# EAGLE board main (EAGLE 7.6.0)
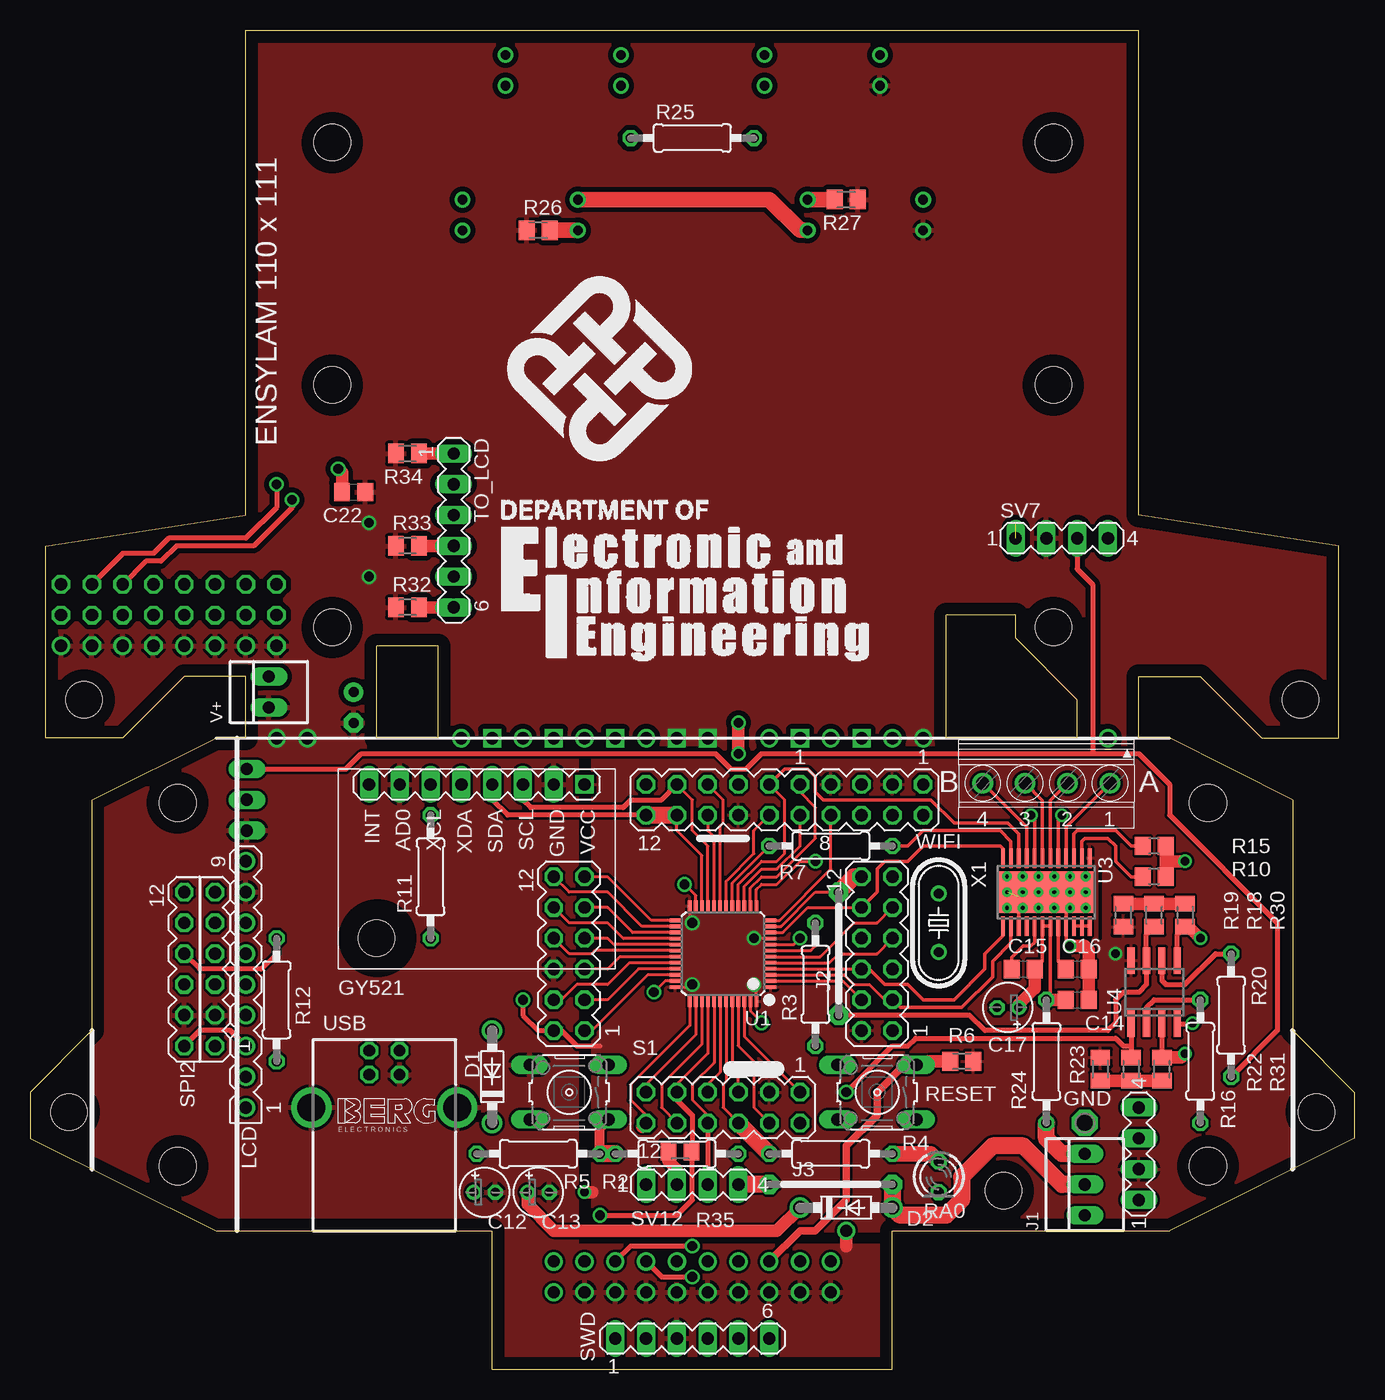
[diagram p0: board, top side]
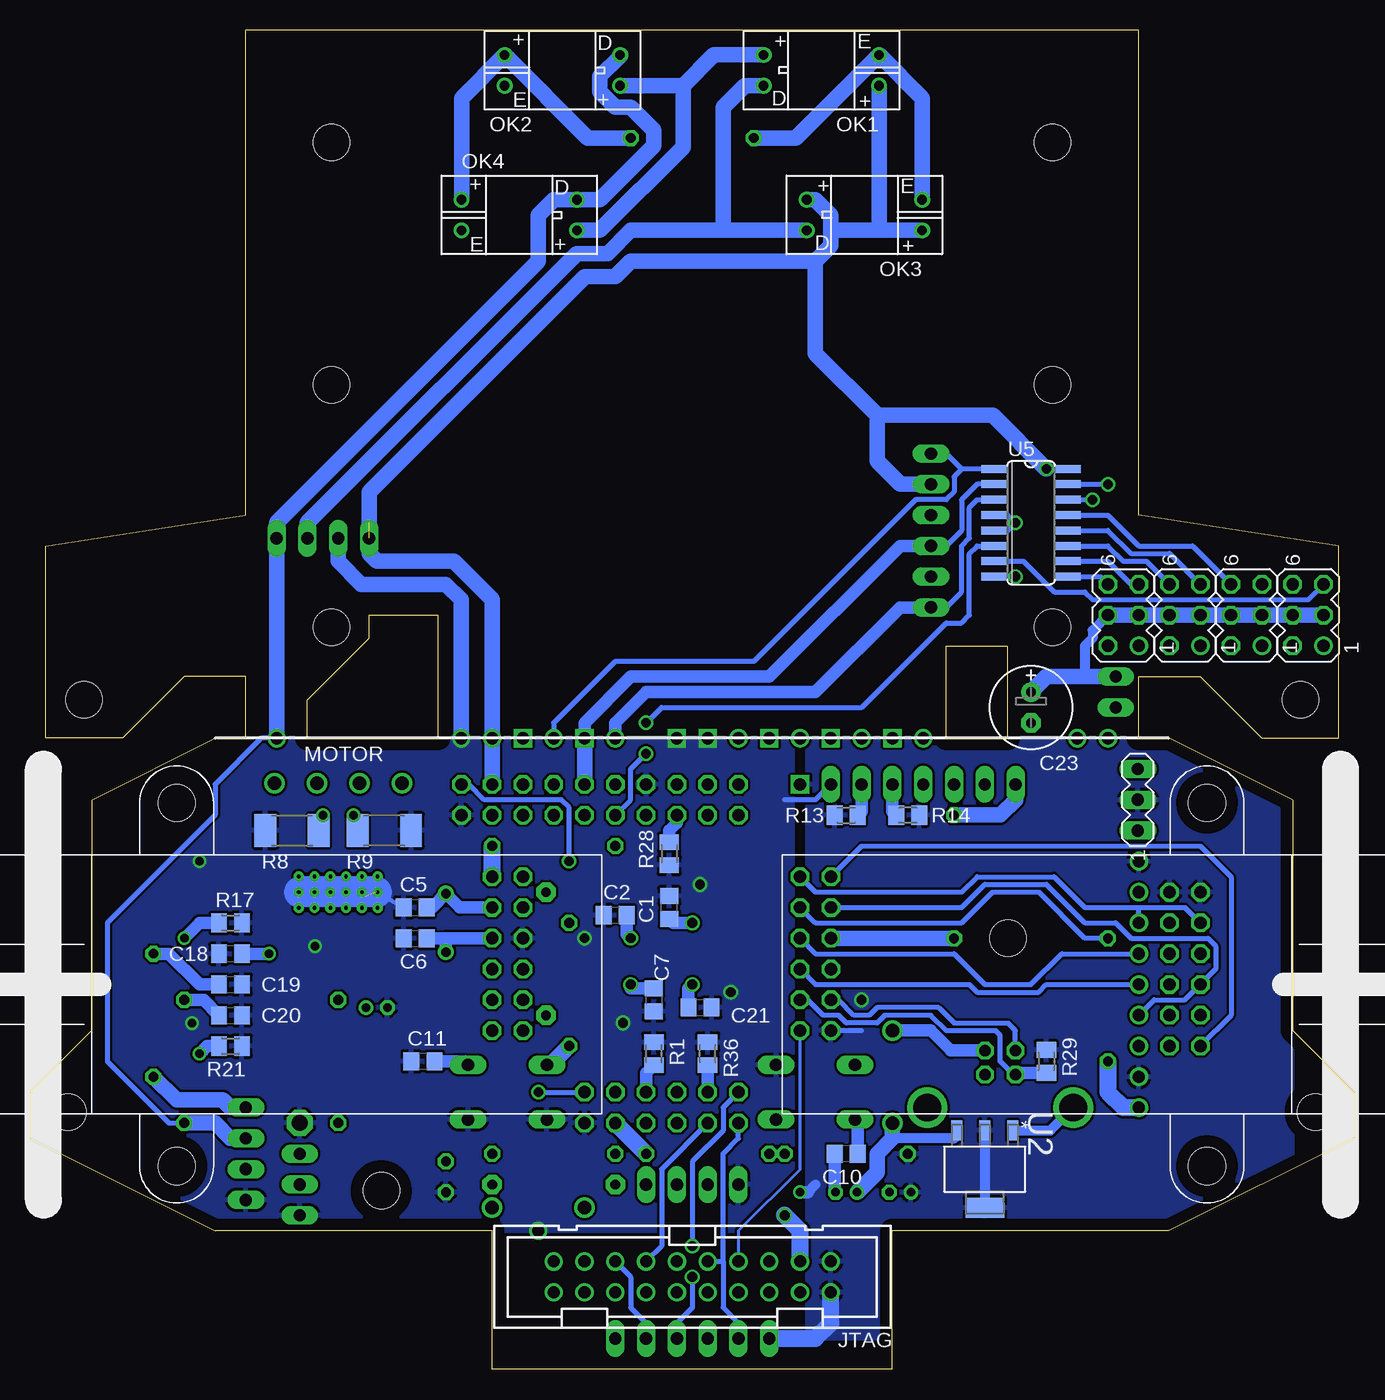
[diagram p1: board, bottom side, seen from below]

Size 109.22 x 110.49 mm. Coordinates in mm from the lower left corner, seen from the top.
Outline: 15.32,11.43 38.1,11.43 38.1,0 71.12,0 71.12,11.43 93.98,11.43 109.22,19.05 109.22,22.86 104.14,27.94 104.14,46.99 93.98,52.07 91.44,52.07 91.44,57.15 96.52,57.15 101.6,52.07 107.95,52.07 107.95,67.94 91.44,70.48 91.44,110.49 17.78,110.49 17.78,70.48 1.27,67.94 1.27,52.07 7.62,52.07 12.7,57.15 17.78,57.15 17.78,52.07 15.32,52.07 5.08,46.99 5.08,27.94 0,22.86 0,19.05 15.32,11.43
Outline: 86.36,52.07 75.56,52.07 75.56,62.23 81.28,62.23 81.28,60.33 86.36,55.24 86.36,52.07
Outline: 28.57,52.07 28.57,59.69 33.66,59.69 33.66,52.07 28.57,52.07
Copper layers (1*16): Top 0.035mm / dielectric 1.5mm / Bottom 0.035mm
Design rules "default": minimum track width 10mil, minimum drill 24mil, track to track 8mil, track to pad 8mil, pad to pad 8mil, via to via 8mil, smd to smd 8mil, copper to edge 40mil, drill to drill 8mil, minimum pad ring 10mil, minimum via ring 8mil, stop-mask expansion 4mil, vias tented up to drill 0mil, thermal gap 10mil
Holes 3 mm at 28.57,35.56 80.26,14.73 24.91,101.22 84.39,101.22 24.91,81.22 84.39,81.22 24.91,61.22 84.39,61.22 106.09,21.22 3.21,21.22 4.45,55.24 104.78,55.24
tRestrict: area 73.7,38.1 to 76.2,40.6; area 73.7,33 to 76.2,35.6; area 25.6,32.6 to 31.6,38.6; 2 lines
bRestrict: area 25.6,32.6 to 31.6,38.6

## Footprints (pad centres in the part's own frame; a part is rotated, then mirrored left to right if it is on the bottom)
C0805 = smd 1.3 x 1.5: 1 -0.95,0; 2 0.95,0
E1,8-4 = drill 0.711 pad 1.168: + -0.889,0 | drill 0.711 pad 1.168 octagon: - 0.889,0
E2,5-7 = drill 0.813 pad 1.6: + -1.27,0 | drill 0.813 pad 1.6 octagon: - 1.27,0
DO41-7.6 = drill 1.1 pad 1.7: A 3.81,0; C -3.81,0
P1-13 = drill 1.321 pad 2.159 octagon: TP 0,0
GY-521 = drill 1.016 square: 1 -8.89,0 | drill 1.016 long: 2 -6.35,0; 3 -3.81,0; 4 -1.27,0; 5 1.27,0; 6 3.81,0; 7 6.35,0; 8 8.89,0
22-23-2031 = drill 1 long: 1 -2.54,0; 2 0,0; 3 2.54,0
10 = drill 0.813 pad 1.6 octagon: 1 -5.08,0; 2 5.08,0
PAK100/2500-20 = drill 1 pad 1.422: 1 -11.43,-1.27; 2 -11.43,1.27; 3 -8.89,-1.27; 4 -8.89,1.27; 5 -6.35,-1.27; 6 -6.35,1.27; 7 -3.81,-1.27; 8 -3.81,1.27; 9 -1.27,-1.27; 10 -1.27,1.27; 11 1.27,-1.27; 12 1.27,1.27; 13 3.81,-1.27; 14 3.81,1.27; 15 6.35,-1.27; 16 6.35,1.27; 17 8.89,-1.27; 18 8.89,1.27; 19 11.43,-1.27; 20 11.43,1.27
MA09-1 = drill 1.016: 1 -10.16,0; 2 -7.62,0; 3 -5.08,0; 4 -2.54,0; 5 0,0; 6 2.54,0; 7 5.08,0; 8 7.62,0; 9 10.16,0
1751264 = drill 1.1 pad 1.7: 1 -5.25,-0.1; 2 -1.75,-0.1; 3 1.75,-0.1; 4 5.25,-0.1
KTIR0511S = drill 0.8: 1 -5.715,1.27; 2 -5.715,-1.27; 3 3.81,-1.27; 4 3.81,1.27
M0805 = smd 1.3 x 1.6: 1 -0.95,0; 2 0.95,0
0207/10 = drill 0.813 octagon: 1 -5.08,0; 2 5.08,0
R2010 = smd 1.8 x 2.7: 1 -2.2,0; 2 2.2,0
R0805 = smd 1.3 x 1.5: 1 -0.95,0; 2 0.95,0
LED3MM = drill 0.813 octagon: A -1.27,0; K 1.27,0
B3F-10XX = drill 1.016 long: 1 -3.251,2.261; 2 3.251,2.261; 3 -3.251,-2.261; 4 3.251,-2.261
MA06-2 = drill 1.016 octagon: 1 -6.35,-1.27; 2 -6.35,1.27; 3 -3.81,-1.27; 4 -3.81,1.27; 5 -1.27,-1.27; 6 -1.27,1.27; 7 1.27,-1.27; 8 1.27,1.27; 9 3.81,-1.27; 10 3.81,1.27; 11 6.35,-1.27; 12 6.35,1.27
MA03-1 = drill 1.016 long: 1 -2.54,0; 2 0,0; 3 2.54,0
MA04-1 = drill 1.016 long: 1 -3.81,0; 2 -1.27,0; 3 1.27,0; 4 3.81,0
MA03-2 = drill 1.016: 1 -2.54,-1.27 | drill 1.016 octagon: 2 -2.54,1.27; 3 0,-1.27; 4 0,1.27; 5 2.54,-1.27; 6 2.54,1.27
MA06-1 = drill 1.016 long: 1 -6.35,0; 2 -3.81,0; 3 -1.27,0; 4 1.27,0; 5 3.81,0; 6 6.35,0
LQFP48-7X7 = smd 0.9 x 0.3: 1 -3.95,2.75; 2 -3.95,2.25; 3 -3.95,1.75; 4 -3.95,1.25; 5 -3.95,0.75; 6 -3.95,0.25; 7 -3.95,-0.25; 8 -3.95,-0.75; 9 -3.95,-1.25; 10 -3.95,-1.75; 11 -3.95,-2.25; 12 -3.95,-2.75; 25 3.95,-2.75; 26 3.95,-2.25; 27 3.95,-1.75; 28 3.95,-1.25; 29 3.95,-0.75; 30 3.95,-0.25; 31 3.95,0.25; 32 3.95,0.75; 33 3.95,1.25; 34 3.95,1.75; 35 3.95,2.25; 36 3.95,2.75 | smd 0.3 x 0.9: 13 -2.75,-3.95; 14 -2.25,-3.95; 15 -1.75,-3.95; 16 -1.25,-3.95; 17 -0.75,-3.95; 18 -0.25,-3.95; 19 0.25,-3.95; 20 0.75,-3.95; 21 1.25,-3.95; 22 1.75,-3.95; 23 2.25,-3.95; 24 2.75,-3.95; 37 2.75,3.95; 38 2.25,3.95; 39 1.75,3.95; 40 1.25,3.95; 41 0.75,3.95; 42 0.25,3.95; 43 -0.25,3.95; 44 -0.75,3.95; 45 -1.25,3.95; 46 -1.75,3.95; 47 -2.25,3.95; 48 -2.75,3.95
SOT230P700X180-4N = smd 1.626 x 0.889: 1 -3.2,2.311; 2 -3.2,0; 3 -3.2,-2.311 | smd 1.626 x 3.175: 4 3.2,0
PWP-TSSOP24 = smd 1.6 x 0.3: 1 -2.8,3.575; 2 -2.8,2.925; 3 -2.8,2.275; 4 -2.8,1.625; 5 -2.8,0.975; 6 -2.8,0.325; 7 -2.8,-0.325; 8 -2.8,-0.975; 9 -2.8,-1.625; 10 -2.8,-2.275; 11 -2.8,-2.925; 12 -2.8,-3.575; 13 2.8,-3.575; 14 2.8,-2.925; 15 2.8,-2.275; 16 2.8,-1.625; 17 2.8,-0.975; 18 2.8,-0.325; 19 2.8,0.325; 20 2.8,0.975; 21 2.8,1.625; 22 2.8,2.275; 23 2.8,2.925; 24 2.8,3.575 | smd 3.4 x 7.8: EXP 0,0 | drill 0.3 pad 0.7: EXP@1 -1.3,3.25; EXP@2 0,3.25; EXP@3 1.3,3.25; EXP@4 -1.3,1.95; EXP@5 0,1.95; EXP@6 1.3,1.95; EXP@7 -1.3,0.65; EXP@8 0,0.65; EXP@9 1.3,0.65; EXP@10 -1.3,-0.65; EXP@11 0,-0.65; EXP@12 1.3,-0.65; EXP@13 -1.3,-1.95; EXP@14 0,-1.95; EXP@15 1.3,-1.95; EXP@16 -1.3,-3.25; EXP@17 0,-3.25; EXP@18 1.3,-3.25
SO08 = smd 0.6 x 2.2: 1 -1.905,-2.6; 2 -0.635,-2.6; 3 0.635,-2.6; 4 1.905,-2.6; 5 1.905,2.6; 6 0.635,2.6; 7 -0.635,2.6; 8 -1.905,2.6
SO16 = smd 0.66 x 2.032: 1 -4.445,-3.073; 2 -3.175,-3.073; 3 -1.905,-3.073; 4 -0.635,-3.073; 5 0.635,-3.073; 6 1.905,-3.073; 7 3.175,-3.073; 8 4.445,-3.073; 9 4.445,3.073; 10 3.175,3.073; 11 1.905,3.073; 12 0.635,3.073; 13 -0.635,3.073; 14 -1.905,3.073; 15 -3.175,3.073; 16 -4.445,3.073
70103 = hole 3.048: -14.986,0; 14.986,0
PN61729-S = drill 0.95 octagon: 1 1.25,4.71; 2 -1.25,4.71; 3 -1.25,2.71; 4 1.25,2.71 | drill 2.3 pad 2.9: S1 -6.02,0; S2 6.02,0
22-23-2021 = drill 1 long: 1 -1.27,0; 2 1.27,0
MA04-2 = drill 1.016 octagon: 1 -3.81,-1.27; 2 -3.81,1.27; 3 -1.27,-1.27; 4 -1.27,1.27; 5 1.27,-1.27; 6 1.27,1.27; 7 3.81,-1.27; 8 3.81,1.27
HC49/S = drill 0.813: 1 -2.413,0; 2 2.413,0

## Placement (x,y rotation side)
C1  0u1  [C0805]  56.52,38.1 90 bottom
C2  0u1  [C0805]  60.96,37.47 180 bottom
C5  12p  [C0805]  77.47,38.1 0 bottom
C6  12p  [C0805]  77.47,35.56 0 bottom
C7  0u1  [C0805]  57.78,30.48 270 bottom
C10  0u1  [C0805]  41.91,17.78 180 bottom
C11  0u1  [C0805]  76.83,25.4 180 bottom
C12  47u  [E1,8-4]  37.47,14.61 0 top
C13  47u  [E1,8-4]  41.91,14.61 0 top
C14  10n  [C0805]  86.36,30.48 0 top
C15  10n  [C0805]  81.92,33.02 0 top
C16  2u2  [C0805]  86.36,33.02 0 top
C17  47u  [E1,8-4]  80.64,29.84 180 top
C18  0u1  [C0805]  92.71,34.29 180 bottom
C19  1n  [C0805]  92.71,31.75 0 bottom
C20  1n  [C0805]  92.71,29.21 0 bottom
C21  0u1  [C0805]  53.98,29.84 0 bottom
C22  0u1  [C0805]  26.67,72.39 0 top
C23  [E2,5-7]  26.67,54.61 270 bottom
D1  1N5819-B  [DO41-7.6]  38.1,24.13 90 top
D2  1N5819-B  [DO41-7.6]  67.31,13.33 0 top
GND  PTR1PAD1-13  [P1-13]  87,20.32 0 top
GY521  GY-521  [GY-521]  36.83,48.26 180 top
J1  22-23-2031  [22-23-2031]  87,15.24 90 top
J2  J10MM  [10]  66.67,34.29 90 top
J3  J10MM  [10]  66.04,15.24 0 top
JTAG  2520-  [PAK100/2500-20]  54.61,7.62 180 bottom
LCD  [MA09-1]  17.78,31.75 90 top
MOTOR  1751264  [1751264]  83.82,48.26 180 top
OK1  PHOTOINTERRUPTERKTIR0511S  [KTIR0511S]  44.92,107.19 180 bottom
OK2  PHOTOINTERRUPTERKTIR0511S  [KTIR0511S]  64.38,107.19 0 bottom
OK3  PHOTOINTERRUPTERKTIR0511S  [KTIR0511S]  41.36,95.25 180 bottom
OK4  PHOTOINTERRUPTERKTIR0511S  [KTIR0511S]  67.93,95.25 0 bottom
R1  10K  [M0805]  57.78,26.04 270 bottom
R2  470R  [0207/10]  53.34,17.78 180 top
R3  0R  [0207/10]  64.77,31.75 90 top
R4  470R  [0207/10]  66.04,17.78 0 top
R5  10K  [0207/10]  41.91,17.78 180 top
R6  10K  [M0805]  76.83,25.4 0 top
R7  0R  [0207/10]  66.04,43.18 180 top
R8  0R4  [R2010]  87.63,44.45 0 bottom
R9  0R4  [R2010]  80.01,44.45 180 bottom
R10  10K  [R0805]  92.71,40.64 180 top
R11  [0207/10]  33.02,40.64 90 top
R12  [0207/10]  20.32,30.48 270 top
R13  2K2  [M0805]  41.91,45.72 180 bottom
R14  2K2  [M0805]  36.83,45.72 0 bottom
R15  10K  [R0805]  92.71,43.18 180 top
R16  1K  [0207/10]  96.52,25.4 90 top
R17  2K2  [M0805]  92.71,36.83 180 bottom
R18  3K3  [M0805]  92.71,37.47 270 top
R19  1K  [M0805]  90.17,37.47 270 top
R20  1K  [0207/10]  99.06,29.21 90 top
R21  2K2  [M0805]  92.71,26.67 180 bottom
R22  3K3  [M0805]  90.81,24.77 90 top
R23  1K  [M0805]  88.27,24.77 90 top
R24  0R  [0207/10]  83.82,25.4 270 top
R25  150R  [0207/10]  54.61,101.6 0 top
R26  4K7  [M0805]  41.91,93.98 0 top
R27  4K7  [M0805]  67.31,96.52 180 top
R28  10K  [M0805]  56.52,42.55 90 bottom
R29  1K5  [M0805]  25.4,25.4 90 bottom
R30  1K  [M0805]  95.25,37.47 90 top
R31  1K  [M0805]  93.34,24.77 270 top
R32  10K  [M0805]  31.11,62.87 0 top
R33  10K  [M0805]  31.11,67.94 0 top
R34  10K  [M0805]  31.11,75.56 180 top
R35  330R  [M0805]  53.59,18.03 0 top
R36  (620R)  [M0805]  53.34,26.04 270 bottom
RA0  [LED3MM]  74.93,15.88 270 top
RESET  [B3F-10XX]  69.85,22.86 180 top
S1  [B3F-10XX]  44.45,22.86 180 top
SPI2  [MA06-2]  13.97,33.02 90 top
SV1  [MA06-2]  44.45,34.29 90 top
SV2  [MA06-2]  57.15,21.59 180 top
SV3  [MA06-2]  69.85,34.29 90 top
SV4  [MA06-2]  57.15,46.99 180 top
SV5  [MA03-1]  17.86,46.99 90 bottom
SV6  [MA04-1]  91.44,17.78 90 top
SV7  [MA04-1]  85.09,68.58 0 top
SV8  [MA03-2]  3.81,62.23 90 bottom
SV9  [MA03-2]  8.89,62.23 90 bottom
SV10  [MA03-2]  13.97,62.23 90 bottom
SV11  [MA03-2]  19.05,62.23 90 bottom
SV12  [MA04-1]  54.61,15.24 0 top
SWD  [MA06-1]  54.61,2.54 0 top
TO_LCD  [MA06-1]  34.92,69.22 270 top
U1  STM32F103CBT7  [LQFP48-7X7]  57.15,34.29 180 top
U2  LM1117MP-3.3  [SOT230P700X180-4N]  30.48,16.51 270 bottom
U3  DRV8834PWP  [PWP-TSSOP24]  83.82,39.37 270 top
U4  LM393D  [SO08]  92.71,31.11 0 top
U5  74HC238D  [SO16]  26.67,69.85 270 bottom
U$1  [POLYU]  46.99,82.55 0 top
U$2  [EIE]  38.73,58.42 0 top
U$5  [70103]  97.15,31.75 90 bottom
U$6  [70103]  12.15,31.75 270 bottom
USB  PN61729-S  [PN61729-S]  29.21,21.59 0 top
V+  22-23-2021  [22-23-2021]  19.68,55.88 90 top
WIFI  [MA04-2]  69.85,46.99 180 top
X1  [HC49/S]  74.93,36.83 270 top

## Library data of the parts
C1 C2 C5-C7 C10-C23 R1-R36 = rcl
D1 D2 = diode
GND = testpad
GY521 OK1-OK4 U1 U2 U5 U$1 U$2 U$5 U$6 = ensylam
J1 = con-molex; MF: MOLEX; MPN: 22-23-2031; OC_FARNELL: 1462950; OC_NEWARK: 30C0862
J2 J3 = jumper
JTAG = con-3m; OC_FARNELL: unknown; OC_NEWARK: unknown
LCD = ensylam; OC_FARNELL: unknown; OC_NEWARK: unknown
MOTOR = con-phoenix-350; MPN: 1751264; OC_FARNELL: unknown; OC_NEWARK: 10R0934
RA0 = led
RESET S1 = switch-omron; MPN: B3F-1000; OC_FARNELL: 176432; OC_NEWARK: 36M3542
SPI2 SV1-SV12 SWD TO_LCD WIFI = con-lstb; OC_FARNELL: unknown; OC_NEWARK: unknown
U3 = ensylam; ELEMENT14: 2115234
U4 = linear
USB = con-berg; OC_FARNELL: unknown; OC_NEWARK: unknown
V+ = con-molex; MF: MOLEX; MPN: 22-23-2021; OC_FARNELL: 1462926; OC_NEWARK: 25C3832
X1 = crystal; OC_FARNELL: 1667008; OC_NEWARK: unknown

## Nets
+3V3: C1.1 C2.1 C7.1 C12.+ C18.1 C21.1 C22.1 GY521.1 JTAG.1 JTAG.2 LCD.2 LCD.9 OK1.1 OK1.3 OK2.3 OK3.1 OK3.3 OK4.3 R5.2 R6.2 R13.2 R14.2 R19.2 R23.2 R29.2 SPI2.11 SPI2.12 SV1.2 SV2.3 SV3.2 SV4.6 SV5.2 SV6.2 SV7.1 SWD.1 TO_LCD.2 U1.1 U1.9 U1.24 U1.36 U1.48 U2.2 U2.4 U3.1 U4.8 U5.16 WIFI.3 WIFI.7
+5V: C23.+ SV8.3 SV8.4 SV9.3 SV9.4 SV10.3 SV10.4 SV11.3 SV11.4 V+.2
BOOT0: R1.2 SV2.5 U1.44
BOOT1: R28.2 SV4.8 U1.20
GND: C1.2 C2.2 C5.1 C6.1 C7.2 C10.2 C11.2 C12.- C13.- C14.2 C16.2 C17.- C18.2 C19.2 C20.2 C21.2 C22.2 C23.- GND.TP GY521.2 GY521.7 J1.1 JTAG.4 JTAG.6 JTAG.8 JTAG.10 JTAG.12 JTAG.14 JTAG.16 JTAG.18 JTAG.20 LCD.8 OK2.2 OK4.2 R1.1 R8.1 R9.1 R10.1 R15.1 R17.1 R21.1 R26.1 R27.1 R28.1 R32.1 R33.1 R34.2 R36.1 RA0.K RESET.1 RESET.2 S1.3 S1.4 SPI2.3 SPI2.4 SV1.6 SV2.2 SV3.8 SV4.5 SV5.1 SV6.1 SV7.2 SV8.1 SV8.2 SV9.1 SV9.2 SV10.1 SV10.2 SV11.1 SV11.2 SV12.1 SWD.3 U1.8 U1.23 U1.35 U1.47 U2.1 U3.15 U3.21 U3.EXP U4.4 U5.4 U5.5 U5.8 USB.4 USB.S1 USB.S2 V+.1 WIFI.2
I2C2_SCL: GY521.3 R13.1 SV4.9 U1.21
I2C2_SDA: GY521.4 R14.1 SV4.10 SV4.12 U1.22
N$1: OK1.4 OK3.4 R20.1 R26.2 SV5.3 SV6.4 SV7.3
N$2: D1.A USB.1
N$3: J3.1 SV12.4
N$4: GY521.8 R11.2
N$5: R3.2 U1.7
N$6: OK1.2 OK3.2 R25.1
N$7: R18.1 R19.1 R30.2
N$8: R22.1 R23.1 R31.2
N$9: LCD.1 R12.2
N$10: OK2.1 OK4.1 R25.2
N$11: R3.1 RESET.4
N$12: OK2.4 OK4.4 R16.1 R27.2 SV6.3 SV7.4
N$13: D2.A J1.2 J3.2
N$14: SV8.6 U5.15
N$16: SV9.5 U5.14
N$17: SV9.6 U5.13
N$18: SV10.5 U5.12
N$19: SV10.6 U5.11
N$20: C19.1 R20.2 U4.6
N$21: R2.2 R5.1 S1.1
N$22: C10.1 S1.2
N$23: SV11.5 U5.10
N$24: SV11.6 U5.9
N$25: SV8.5 U5.7
N$27: C13.+ D1.C D2.C U2.3
N$31: R4.2 RA0.A
N$32: R7.2 U1.17
N$33: R35.1 SV12.2
N$37: R8.2 U3.5
N$42: R9.2 U3.8
N$43: R10.2 U3.2
N$46: R15.2 U3.3
N$47: U3.22 U3.23 U3.24
N$48: C15.1 U3.17
N$49: C16.1 U3.20
N$51: R17.2 R30.1 U4.5
N$52: C20.1 R16.2 U4.2
N$53: R21.2 R31.1 U4.3
N$54: C14.1 C15.2 C17.+ R24.1 U3.18 U3.19
NRST: C11.1 JTAG.15 R6.1 RESET.3 SWD.5
PA0: SV3.10 U1.10 U3.12
PA4: R33.2 SV4.1 TO_LCD.4 U1.14 U5.2
PA5: SV4.2 U1.15
PA8: LCD.6 SV1.7 U1.29
PA9: R11.1 SV1.8 U1.30
PA10: LCD.5 SV1.5 U1.31
PA13: JTAG.7 SV1.1 SWD.4 U1.34
PA14: JTAG.9 SV2.12 SWD.2 U1.37
PA15: JTAG.5 SV2.11 U1.38
PB1: SV4.7 U1.19
PB3: JTAG.13 SV2.10 U1.39
PB4: JTAG.3 R35.2 R36.2 SV2.9 U1.40
PB5: SV2.8 SV12.3 U1.41
PB6: SV2.7 U1.42
PB7: R4.1 SV2.6 U1.43
PB8: R2.1 SV2.4 U1.45
PC13: SV3.4 U1.2
PC14: SV3.3 U1.3 U3.14
PC15: SV3.6 U1.4 U3.13
PD0: C6.2 SV3.7 U1.5 X1.2
PD1: C5.2 SV3.9 U1.6 X1.1
SPI2_MISO: R12.1 SPI2.8 SV1.9 U1.27
SPI2_MOSI: LCD.4 SPI2.6 SV1.10 U1.28
SPI2_NSS: LCD.7 SPI2.10 SV1.11 U1.25
SPI2_SCK: LCD.3 SPI2.2 SV1.12 U1.26
TIM2_CH2: J2.2 SV3.12 U1.11
TIM2_CH2A: J2.1 R18.2 U4.7
TIM3_CH1: SV4.3 U1.16 U3.10
TIM3_CH2: R7.1 SV3.11 U3.11
TIM3_CH3: SV4.4 U1.18 U5.6
TIM4_CH4: R22.2 SV2.1 U1.46 U4.1
U5A: R34.1 TO_LCD.1 U5.1
U5C: R32.2 TO_LCD.6 U5.3
USART2_RX: U1.13 WIFI.1
USART2_TX: U1.12 WIFI.8
USBDM: SV1.4 U1.32 USB.2
USBDP: R29.1 SV1.3 U1.33 USB.3
V+: J1.3 R24.2
X21: MOTOR.4 U3.9
X22: MOTOR.3 U3.7
X23: MOTOR.2 U3.6
X24: MOTOR.1 U3.4

## Tracks (layer width: path | path; a pad name or v marks a point on that pad's centre or on a via)
+3V3  (via drill 0.7, 0.8, 1)  (1 unrouted)
  Top 0.254: U1.48 59.9,31.54 v59.69,31.75 | U1.9 59.71,35.54 v59.69,35.56 | U1.24 54.4,37.04 v54.61,36.83 | U1.36 54.4,31.54 v54.61,31.75
  Top 0.406: 90.75,34.29 U4.8 | 46.99,26.67 45.09,26.67 43.81,27.94 SV1.2 41.91,27.94 40.64,29.21 v40.64,30.48
  Top 1.016: v45.72,14.61 46.35,14.61 | C22.1 25.72,73.97 v25.4,74.3
  Top 1.27: OK4.3 63.5,93.98 60.96,96.52 OK3.3
  Bottom 0.406: SV1.2 40.64,27.94 | U5.16 v25.4,74.3
  Bottom 0.813: U2.2 U2.4 31.09,13.31 | 45.09,14.61 44.45,15.24
  Bottom 1.016: C18.1 v89.53,34.29 | v45.72,14.61 45.09,14.61 | C2.1 60.01,35.88 v59.69,35.56 | v54.61,36.83 56.2,36.83 C1.1 | C21.1 54.92,31.43 v54.61,31.75 | C7.1 59.69,31.43 v59.69,31.75
  Bottom 1.27: 44.45,91.44 59.69,91.44 60.96,90.17 63.5,90.17 81.28,72.39 81.28,69.85 | 44.45,91.44 43.18,92.71 43.18,93.98 | 43.18,93.98 43.18,95.25 44.45,96.52 OK3.3 | OK1.3 52.83,108.46 55.37,105.92 | 55.37,105.92 55.37,100.84 62.23,93.98 OK4.3 63.5,93.98 | OK2.3 55.37,105.92 | WIFI.3 v71.12,52.07 71.12,63.5 74.3,66.67 80.64,66.67 81.28,67.31 SV7.1 | OK3.1 39.37,93.98 | 39.37,93.98 43.18,93.98 | OK1.1 39.21,94.14 39.37,93.98 | 39.37,78.74 29.84,78.74 v25.4,74.3 | 39.37,78.74 44.45,83.82 44.45,91.44 | TO_LCD.2 37.47,73.03 39.37,74.93 39.37,78.74
  Bottom 1.422: SWD.1 44.45,2.54 43.18,3.81 JTAG.2
  pour Top: 46.35,52.07 46.35,11.43 104.14,11.43 104.14,52.07 72.39,52.07 72.39,50.8 69.85,50.8 69.85,52.07
  pour Bottom: 5.16,52.07 5.16,11.43 38.1,11.43 38.1,2.54 45.09,2.54 45.09,52.07
+5V
  Bottom 0.813: SV11.4 21.59,60.96 21.59,60.33 22.23,59.69 22.23,57.15
  Bottom 1.27: V+.2 22.23,57.15 25.4,57.15 C23.+ | SV11.4 SV11.3 SV10.4 SV10.3 SV9.4 SV9.3 SV8.4 SV8.3
BOOT0
  Top 0.254: U1.44 57.9,24.65 58.42,24.13 SV2.5
  Bottom 1.016: SV2.5 58.42,24.45 R1.2
BOOT1
  Top 0.254: U1.20 56.4,43.93 55.88,44.45 SV4.8
  Bottom 1.016: R28.2 56.52,44.45 55.88,45.09 SV4.8
GND  (via drill 0.7, 0.8, 1)  (1 unrouted)
  Top 0.254: U1.47 59.4,29.55 v60.33,28.57 | U1.8 62.98,35.04 v63.5,35.56 | U1.23 54.9,39.08 v53.98,40 | U1.35 52.36,32.04 v51.44,31.11
  Top 0.305: U3.EXP 85.44,37.75 U3.21 85.44,35.2 v85.72,34.92 | U3.15 81.55,39 81.92,39.37
  Top 0.406: U4.4 95.83,28.52 v95.89,28.57
  Top 1.016: v85.72,34.92 87,34.92 87.31,34.61 C16.2 C14.2 | R15.1 93.66,41.91 | 93.66,41.91 R10.1 | v95.25,41.91 93.66,41.91 | v67.31,11.43 67.31,10.16
  Bottom 0.406: 80.64,39.37 C5.1 | GY521.2 44.45,46.99 46.99,46.99 | U5.5 28.57,69.22 v27.94,69.85 28.57,70.48 U5.4 | U5.8 v27.94,65.41
  Bottom 0.813: U2.1 25.07,19.71 USB.S1
  Bottom 1.016: C10.2 42.86,14.67 C13.-
  Bottom 1.27: SV7.2 83.82,66.67 81.92,64.77 74.93,64.77 73.66,63.5 v73.66,52.07
  Bottom 2.54: 80.64,39.37 87,39.37
  other vias: 20.32,52.07 22.86,52.07 53.34,52.07 55.88,52.07
  pour Bottom: 46.35,52.07 46.35,11.43 104.14,11.43 104.14,52.07
  pour Top: 5.16,52.07 5.16,11.43 38.1,11.43 38.1,0 71.12,0 71.12,10.16 45.09,10.16 45.09,52.07
  pour Top (isolate 0.406): 1.27,109.22 1.27,50.8 107.95,50.8 107.95,109.22
I2C2_SCL
  Top 0.254: U1.21 55.9,43.16 54.61,44.45 54.61,46.99 SV4.9
  Top 0.406: GY521.3 40.64,46.99 41.27,46.35 48.9,46.35 49.53,46.99 52.07,46.99 SV4.9
  Bottom 1.016: R13.1 40.64,46.04 GY521.3
I2C2_SDA
  Top 0.254: U1.22 55.4,42.39 53.34,44.45 SV4.10
  Top 0.406: SV4.12 39.37,45.72 38.1,46.99 GY521.4
  Top 1.422: SV4.12 SV4.10
  Bottom 1.016: R14.1 38.1,46.04 GY521.4
N$1
  Top 0.406: SV5.3 26.04,49.53 27.3,50.8 56.52,50.8 57.78,49.53 59.05,49.53 60.33,50.8 87.63,50.8 | 87.63,50.8 91.44,50.8 93.98,48.26 93.98,45.72 102.87,36.83 102.87,27.94 R20.1 | SV7.3 86.36,66.04 87.63,64.77 87.63,50.8
  Top 1.27: R26.2 OK3.4
  Bottom 1.27: SV6.4 92.71,21.59 93.34,22.23 97.16,22.23 R20.1 | OK3.4 52.07,93.98 | OK1.4 50.29,105.92 52.07,104.14 52.07,93.98 | 52.07,93.98 59.69,93.98 61.59,92.07 64.14,92.07 86.36,69.85 SV7.3
N$2
  Bottom 1.016: USB.1 33.28,26.3 34.92,27.94 D1.A
N$3
  Top 1.422: J3.1 SV12.4
N$4
  Bottom 1.27: R11.2 29.21,45.72 27.94,46.99 GY521.8
N$5
  Top 0.254: U1.7 64.39,34.54 64.77,34.92 R3.2
N$6
  Bottom 1.27: OK3.2 35.65,104.9 OK1.2 46.06,101.6 R25.1
N$7
  Top 1.016: R19.1 R18.1 R30.2
N$8
  Top 1.016: R23.1 R22.1 R31.2
N$9
  Bottom 1.422: R12.2 20.32,22.86 19.05,21.59 LCD.1
N$10
  Bottom 1.27: OK4.1 73.65,104.9 OK2.1 63.23,101.6 R25.2
N$11
  Bottom 1.27: RESET.4 66.32,25.12 R3.1
N$12  (via drill 1)
  Top 1.27: R27.2 OK4.4
  Bottom 0.406: R16.1 97.79,20.32 102.87,25.4 102.87,36.83 93.98,45.72 93.98,48.26 90.17,52.07 v88.9,52.07
  Bottom 1.27: SV6.3 92.71,19.05 93.98,20.32 R16.1 | v88.9,52.07 SV7.4 88.9,69.85 67.31,91.44 67.31,95.25 66.04,96.52 OK4.4 62.23,96.52 57.78,100.97 57.78,102.24 59.69,104.14 60.96,104.14 62.23,105.41 62.23,106.68 60.57,108.34 OK2.4
N$13
  Top 0.406: 71.75,12.7 71.12,12.7 71.12,12.95
  Top 1.422: J1.2 85.09,15.24 81.92,18.41 79.38,18.41 76.83,15.88 76.83,13.97 75.56,12.7 71.75,12.7 D2.A J3.2
N$14  (via drill 0.8)
  Top 0.406: v20.32,73.03 20.32,71.12 17.78,68.58 11.43,68.58 10.16,67.31 7.62,67.31 SV8.6
  Bottom 0.406: U5.15 v20.32,73.03
N$15  (via drill 1)  (7 unrouted)
  other vias: 35.56,52.07 38.1,52.07 40.64,52.07 43.18,52.07 45.72,52.07 48.26,52.07 50.8,52.07 68.58,52.07
N$16  (via drill 0.8)
  Top 0.406: v21.59,71.75 21.59,71.12 18.41,67.94 12.06,67.94 10.79,66.67 9.53,66.67 SV9.5
  Bottom 0.406: U5.14 v21.59,71.75
N$17
  Bottom 0.406: U5.13 20.32,70.48 17.78,67.94 13.34,67.94 SV9.6
N$18
  Bottom 0.406: U5.12 20.32,69.22 18.41,67.31 15.24,67.31 SV10.5
N$19
  Bottom 0.406: U5.11 20.32,67.94 19.05,66.67 17.14,66.67 SV10.6
N$20
  Top 0.406: U4.6 93.34,32.06 C19.1 95.25,31.75 97.79,34.29 R20.2
  Bottom 1.016: C19.1 95.25,31.75 97.79,34.29 R20.2
N$21
  Top 0.813: R5.1 46.99,19.89 S1.1
  Top 1.422: R2.2 R5.1
N$22
  Bottom 1.016: C10.1 40.96,20.36 S1.2
N$23
  Bottom 0.406: U5.10 20.32,66.67 18.41,64.77 SV11.5
N$24
  Bottom 0.406: U5.9 20.95,65.41 SV11.6
N$25
  Bottom 0.406: U5.7 27.3,66.67 24.77,64.13 22.23,64.13 21.59,63.5 3.81,63.5 SV8.5
N$27
  Top 1.016: C13.+ 41.02,13.59 43.18,11.43 61.59,11.43 D2.C
  Bottom 0.813: U2.3 32.79,19.28 33.02,19.05 38.1,19.05
  Bottom 1.27: D1.C 38.1,19.05 39.37,17.78 39.37,16.26 C13.+
N$31
  Top 1.27: R4.2 74.3,17.78 RA0.A
N$32
  Top 0.254: U1.17 57.9,40.12 R7.2
N$33
  Top 1.016: R35.1 52.64,17.21 53.34,16.51 SV12.2
N$37  (via drill 0.7)
  Top 0.305: U3.5 84.8,45.42 v85.09,45.72
  Bottom 0.305: R8.2 85.43,45.38 v85.09,45.72
N$42  (via drill 0.7)
  Top 0.305: U3.8 82.84,45.42 v82.55,45.72
  Bottom 0.305: R9.2 82.21,45.38 v82.55,45.72
N$43
  Top 0.305: U3.2 86.75,43.56 87,43.81 88.9,43.81 89.53,43.18 89.53,41.91 90.81,40.64 R10.2
N$46
  Top 0.305: U3.3 86.09,44.19 86.36,44.45 89.53,44.45 90.81,43.18 R15.2
N$47
  Top 0.305: U3.22 U3.23 U3.24
N$48
  Top 0.305: U3.17 82.84,35.22 82.55,34.92 81.92,34.92 80.97,33.98 C15.1
N$49
  Top 0.305: U3.20 84.8,33.63 C16.1
N$51  (via drill 0.7)
  Top 0.406: U4.5 94.61,35.88 R30.1
  Top 1.016: v96.52,35.56 95.56,36.52 R30.1
  Bottom 1.016: R17.2 95.25,36.83 v96.52,35.56
N$52
  Top 0.406: U4.2 92.08,29.84 92.71,30.48 R16.2
  Bottom 1.016: R16.2 94.93,30.48 C20.1
N$53  (via drill 0.7)
  Top 0.406: U4.3 R31.1
  Top 1.016: R31.1 94.93,25.71 v95.25,26.04
  Bottom 1.016: R21.2 94.61,26.67 v95.25,26.04
N$54
  Top 0.305: C15.2 83.5,33.65 U3.18 U3.19 84.14,30.8 R24.1
  Top 1.016: C14.1 R24.1 | C17.+ 81.53,30.1 82.86,31.43 C15.2
NRST
  Top 0.61: RESET.3 72.11,25.12 69.85,22.86 69.85,20.95 67.31,18.41 67.31,13.97 64.77,11.43 63.5,11.43 JTAG.15
  Top 1.016: R6.1 74.09,25.4 RESET.3
  Bottom 0.406: JTAG.15 59.69,7.62 59.69,5.08 58.42,3.81 SWD.5
  Bottom 1.016: R6.1 73.38,25.4 RESET.3
PA0
  Top 0.254: U1.10 62.08,36.04 64.14,38.1 SV3.10
  Top 0.305: U3.12 80.25,42.95 80.01,43.18 73.66,43.18 72.39,41.91 70.48,41.91 69.85,41.27 69.85,39.37 SV3.10
PA4  (via drill 1)
  Top 0.254: U1.14 59.4,39.72 60.33,40.64 61.59,40.64 64.77,43.81 64.77,46.35 63.5,47.62 SV4.1
  Top 1.016: R33.2 TO_LCD.4
  Bottom 0.406: U5.2 31.11,73.03 32.38,71.75 32.38,69.22 33.66,67.94 TO_LCD.4
  Bottom 1.016: TO_LCD.4 37.47,67.94 48.26,57.15 59.69,57.15 63.5,53.34 v63.5,52.07
  Bottom 1.27: SV4.1 v63.5,52.07
PA5
  Top 0.254: U1.15 58.9,39.85 60.33,41.27 61.59,41.27 63.5,43.18 SV4.2
PA8
  Top 0.254: U1.29 48.15,35.04 47.62,35.56 SV1.7
  Bottom 0.406: SV1.7 44.45,34.29 33.02,34.29 30.48,31.75 26.67,31.75 24.13,34.29 LCD.6
PA9
  Top 0.254: U1.30 46.6,34.54 46.35,34.29 44.45,34.29 SV1.8
  Bottom 1.27: SV1.8 R11.1
PA10
  Top 0.254: U1.31 48.65,34.04 47.62,33.02 SV1.5
  Bottom 0.406: SV1.5 44.45,31.75 31.75,31.75 31.11,31.11 26.04,31.11 25.4,31.75 LCD.5
PA13  (via drill 0.8)
  Top 0.254: U1.34 50.95,32.54 46.35,27.94 SV1.1
  Top 0.406: JTAG.7 52.07,7.62 v54.61,7.62
  Bottom 0.254: SV1.1 45.72,16.51 50.8,11.43 JTAG.7
  Bottom 0.406: v54.61,7.62 54.61,5.08 55.88,3.81 SWD.4
PA14
  Top 0.254: U1.37 54.4,28.36 49.53,23.49 49.53,22.23 50.8,20.95 SV2.12
  Top 1.016: 50.48,20 SV2.12
  Bottom 0.406: 52.07,8.89 52.07,17.78 50.8,19.05 SV2.12 | 52.07,8.89 52.07,5.08 50.8,3.81 SWD.2 | JTAG.9 52.07,8.89
PA15  (via drill 0.8)
  Top 0.254: U1.38 54.9,27.59 50.8,23.49 SV2.11
  Top 0.406: v54.61,10.16 49.53,10.16 JTAG.5
  Bottom 0.406: SV2.11 52.07,21.59 52.07,19.69 54.61,17.14 v54.61,10.16
PB1
  Top 0.254: U1.19 56.9,44.84 57.15,45.09 57.15,46.99 SV4.7
PB3
  Top 0.254: U1.39 55.4,26.82 52.07,23.49 52.07,21.59 SV2.10
  Bottom 0.406: SV2.10 57.15,16.51 57.15,10.16 JTAG.13
PB4  (via drill 0.8)
  Top 0.254: U1.40 55.9,26.05 53.34,23.49 SV2.9
  Top 0.406: SV2.9 53.34,22.23 54.61,20.95 54.61,18.1 R35.2 54.61,17.97 54.61,13.97 53.34,12.7 v46.99,12.7
  Bottom 1.016: SV2.9 R36.2
  Bottom 1.422: JTAG.3 45.72,11.43 v46.99,12.7
PB5
  Top 0.254: U1.41 56.4,25.29 54.61,23.49 54.61,22.23 55.88,20.95 SV2.8
  Top 0.406: SV2.8 SV12.3
PB6
  Top 0.254: U1.42 56.9,24.52 55.88,23.49 SV2.7
PB7
  Top 0.254: U1.43 57.4,23.74 57.15,23.49 57.15,21.59 SV2.6
  Top 1.422: R4.1 SV2.6
PB8
  Top 0.254: U1.45 58.4,26.69 59.69,25.4 59.69,21.59 SV2.4
  Bottom 1.422: SV2.4 R2.1
PC13
  Top 0.254: U1.2 67.02,32.04 SV3.4
PC14
  Top 0.254: U1.3 67.16,32.54 67.94,31.75 69.22,31.75 70.48,30.48 SV3.3
  Top 0.305: U3.14 80.89,35.17 79.38,33.66 79.38,32.38 76.83,29.84 71.75,29.84 SV3.3
PC15
  Top 0.254: U1.4 68.56,33.04 SV3.6
  Top 0.305: U3.13 80.25,35.8 78.74,34.29 78.74,33.02 76.2,30.48 73.66,30.48 72.39,31.75 70.48,31.75 69.22,33.02 SV3.6
PD0
  Top 0.254: U1.5 65.92,33.54 66.67,34.29 69.85,34.29 SV3.7
  Bottom 1.016: X1.2 74.93,35.56 | C6.2 74.93,35.56 | SV3.7 74.93,35.56
PD1
  Top 0.254: U1.6 65.16,34.04 67.94,36.83 69.85,36.83 SV3.9
  Bottom 1.016: C5.2 76.07,38.1 X1.1 73.79,38.1 SV3.9
SPI2_MISO
  Top 0.254: U1.27 49.69,36.04 47.62,38.1 SV1.9
  Top 0.406: SPI2.8 13.97,33.02 19.05,33.02 20.32,34.29 R12.1
  Bottom 0.406: SV1.9 44.45,36.83 32.38,36.83 29.84,39.37 26.04,39.37 22.23,35.56 R12.1
SPI2_MOSI
  Top 0.254: U1.28 48.91,35.54 47.62,36.83 44.45,36.83 SV1.10
  Bottom 0.406: SV1.10 32.38,38.1 30.48,40 25.4,40 22.23,36.83 19.68,36.83 18.41,35.56 12.06,35.56 11.43,34.92 11.43,33.02 SPI2.6 13.97,30.48 16.51,30.48 LCD.4
SPI2_NSS
  Top 0.254: U1.25 51.23,37.04 47.62,40.64 SV1.11
  Bottom 0.406: SV1.11 44.45,39.37 32.38,39.37 31.11,40.64 24.77,40.64 22.23,38.1 17.78,38.1 | SPI2.10 13.97,38.1 17.78,38.1 | LCD.7 17.78,38.1
SPI2_SCK
  Top 0.254: U1.26 50.45,36.54 47.62,39.37 44.45,39.37 SV1.12
  Top 0.406: LCD.3 16.51,27.94 13.97,27.94 SPI2.2
  Bottom 0.406: SV1.12 40.64,43.18 12.7,43.18 10.16,40.64 10.16,29.21 SPI2.2
TIM2_CH2
  Top 0.254: U1.11 61.94,36.54 64.77,39.37 J2.2
  Top 1.422: SV3.12 67.94,40.64 J2.2
TIM2_CH2A
  Top 0.406: R18.2 92.08,35.88 U4.7 92.08,31.75 91.44,31.11 90.17,31.11 89.53,30.48 89.53,28.57 88.9,27.94 78.74,27.94 77.47,29.21 J2.1
TIM3_CH1
  Top 0.254: SV4.3 62.23,46.99 62.23,42.55 61.59,41.91 60.33,41.91 58.4,39.98 U1.16
  Top 0.305: U3.10 81.55,44.19 80.64,45.09 76.2,45.09 74.3,46.99 65.41,46.99 64.77,47.62 64.77,48.9 64.14,49.53 62.23,49.53 SV4.3
TIM3_CH2
  Top 0.305: U3.11 80.89,43.56 80.01,44.45 73.66,44.45 72.39,43.18 R7.1
  Bottom 1.422: SV3.11 R7.1
TIM3_CH3  (via drill 0.8)
  Top 0.254: U1.18 57.4,40.25 59.69,42.55 59.69,44.45 SV4.4
  Top 1.016: v58.42,50.8 v58.42,53.34
  Bottom 0.406: SV4.4 59.69,46.99 59.69,49.53 v58.42,50.8 | v58.42,53.34 57.15,54.61 40.64,54.61 33.66,61.59 32.38,61.59 31.75,62.23 31.75,67.31 31.11,67.94 U5.6
TIM4_CH4  (via drill 0.8)
  Top 0.254: U1.46 58.9,27.46 SV2.1
  Top 0.406: U4.1 90.81,26.67 | 90.81,26.67 R22.2 | 90.81,26.67 90.17,26.67 89.53,27.3 73.03,27.3 72.39,26.67 71.12,26.67 v67.31,22.86
  Bottom 0.406: v67.31,22.86 SV2.1
U5A  (via drill 1)
  Top 1.016: R34.1 TO_LCD.1
  Bottom 0.406: U5.1 32.38,74.3 | TO_LCD.1 33.66,75.56 32.38,74.3 | 32.38,74.3 33.02,73.66 33.02,72.39 33.66,71.75 36.2,71.75 49.53,58.42 60.96,58.42 66.04,53.34 v66.04,52.07
U5C  (via drill 1)
  Top 1.016: R32.2 TO_LCD.6
  Bottom 0.406: U5.3 31.11,71.75 31.75,71.12 31.75,68.58 32.38,67.94 32.38,64.13 33.66,62.87 TO_LCD.6
  Bottom 1.016: TO_LCD.6 37.47,62.87 44.45,55.88 58.42,55.88 60.96,53.34 v60.96,52.07
USART2_RX  (via drill 0.8)
  Top 0.254: U1.13 59.9,39.58 60.33,40 61.59,40 63.5,41.91 v64.77,41.91
  Bottom 0.406: WIFI.1 73.03,48.26 71.75,46.99 65.41,46.99 64.77,46.35 v64.77,41.91
USART2_TX
  Top 0.254: WIFI.8 66.04,41.27 61.8,37.04 U1.12
USBDM
  Top 0.254: U1.32 49.41,33.54 47.62,31.75 45.09,31.75 43.81,30.48 SV1.4
  Bottom 0.406: SV1.4 42.55,30.48 41.27,29.21 40.01,29.21 39.37,29.84 34.29,29.84 33.02,28.57 28.57,28.57 27.96,27.96 USB.2
USBDP
  Top 0.254: U1.33 50.19,33.04 47.62,30.48 SV1.3
  Bottom 0.406: SV1.3 45.09,30.48 43.81,29.21 42.55,29.21 41.91,28.57 39.37,28.57 38.73,29.21 34.92,29.21 33.66,27.94 29.6,27.94 29.21,27.55 29.21,25.4 28.11,24.3 USB.3
  Bottom 1.016: R29.1 27.81,24.45 USB.3
V+
  Top 1.422: J1.3 85.09,17.78 83.82,19.05 R24.2
X21
  Top 0.305: U3.9 82.19,44.73 MOTOR.4
X22
  Top 0.305: U3.7 83.5,46.94 MOTOR.3
X23
  Top 0.305: U3.6 84.14,46.94 MOTOR.2
X24
  Top 0.305: U3.4 85.44,44.73 MOTOR.1

## Text on the board
tPlace: ENSYLAM 110 x 111 | B | A